# EAGLE board cadi_2k2_buttons_140614 (EAGLE 6.1)
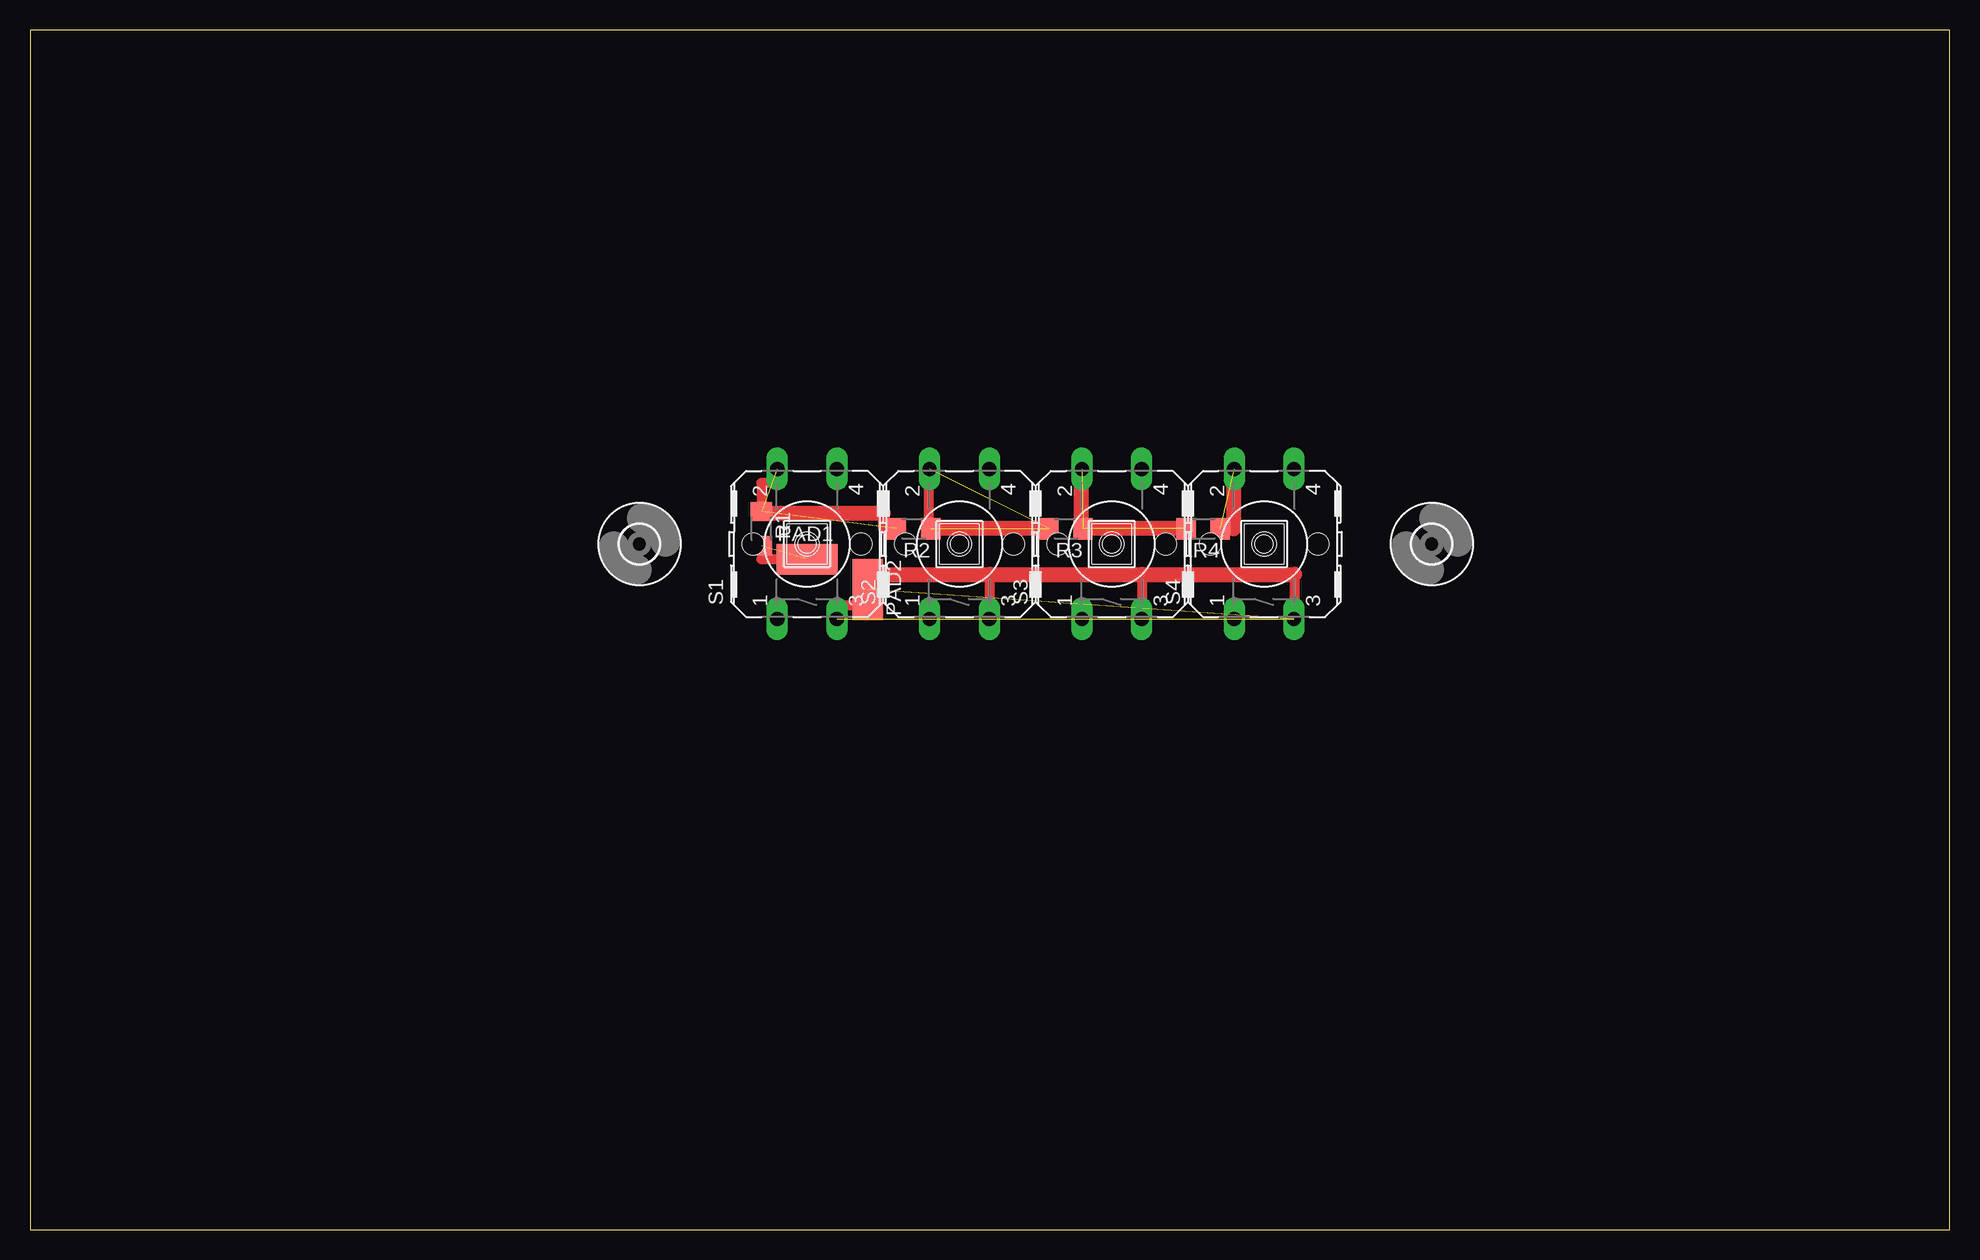
[diagram p0: board, top side]

Size 160 x 100 mm. Coordinates in mm from the lower left corner, seen from the top.
Outline: 0,0 160,0 160,100 0,100 0,0
Copper layers (1*16): Top 0.035mm / dielectric 1.5mm / Bottom 0.035mm
Design rules: minimum track width 10mil, minimum drill 24mil, track to track 8mil, track to pad 8mil, pad to pad 8mil, via to via 8mil, smd to smd 8mil, copper to edge 40mil, drill to drill 8mil, minimum pad ring 10mil, minimum via ring 8mil, stop-mask expansion 4mil, vias tented up to drill 0mil, thermal gap 10mil

## Footprints (pad centres in the part's own frame; a part is rotated, then mirrored left to right if it is on the bottom)
3,2 = hole 3.2: 0,0
SMD2,54-5,08 = smd 2.54 x 5.08: 1 0,0
R1206 = smd 1.6 x 1.803: 1 -1.422,0; 2 1.422,0
B3F-40XX = drill 1.194 long: 1 -6.248,2.489; 2 6.248,2.489; 3 -6.248,-2.489; 4 6.248,-2.489 | hole 1.803: 0,-4.496; 0,4.496

## Placement (x,y rotation side)
H1  MOUNT-HOLE3.2  [3,2]  50.8,57.15 0 top
H2  MOUNT-HOLE3.2  [3,2]  116.84,57.15 0 top
PAD1  VCC  [SMD2,54-5,08]  64.77,55.88 270 top
PAD2  TO_ADC  [SMD2,54-5,08]  69.85,53.34 180 top
R1  2k2  [R1206]  60.96,58.42 270 top
R2  2k2  [R1206]  73.66,58.42 180 top
R3  2k2  [R1206]  86.36,58.42 180 top
R4  2k2  [R1206]  97.79,58.42 180 top
S1  [B3F-40XX]  64.77,57.15 90 top
S2  [B3F-40XX]  77.47,57.15 90 top
S3  [B3F-40XX]  90.17,57.15 90 top
S4  [B3F-40XX]  102.87,57.15 90 top

## Library data of the parts
H1 H2 = holes
PAD1 PAD2 = wirepad
R1-R4 = resistor
S1-S4 = switch-omron; MF: OMRON COMPONENTS USA; MPN: B3F-4000; OC_FARNELL: 176434; OC_NEWARK: 36K3105

## Nets
N$1: R4.1 S4.2
N$2: R3.1 R4.2 S3.2
N$3: R2.1 R3.2 S2.2
N$4: R1.1 R2.2 S1.2
N$5: PAD1.1 R1.2
N$6: PAD2.1 S1.3 S2.3 S3.3 S4.3

## Tracks (layer width: path | path; a pad name or v marks a point on that pad's centre or on a via)
N$1  (1 unrouted)
N$2  (2 unrouted)
N$3  (2 unrouted)
N$4  (2 unrouted)
N$5  (1 unrouted)
N$6  (4 unrouted)
N$8
  Top 0.813: 60.96,55.88 63.5,55.88
N$9
  Top 0.813: 67.31,52.07 69.85,52.07 69.85,54.61 | 80.01,52.07 80.01,54.61 | 92.71,52.07 92.71,54.61 | 105.41,54.61 105.41,52.07
  Top 1.27: 69.85,54.61 80.01,54.61 92.71,54.61 105.41,54.61
N$10
  Top 0.813: 100.33,58.42 99.06,58.42
  Top 1.27: 100.33,62.23 100.33,58.42
N$11
  Top 1.27: 96.52,58.42 87.63,58.42 87.63,62.23
N$12
  Top 0.813: 74.93,58.42 74.93,62.23
  Top 1.27: 85.09,58.42 74.93,58.42
N$13
  Top 0.813: 72.39,58.42 71.12,58.42 71.12,59.69 | 62.23,62.23 60.96,62.23 60.96,59.69
  Top 1.27: 71.12,59.69 60.96,59.69